# Altium PCB Xe_VDK_PCB - Copy.PcbDoc
Units mm, origin at the board's own origin, x right, y up, seen from the top; angles counter-clockwise.
Board outline 106.22 x 56.87 mm, 2 copper layers (Top Layer, Bottom Layer); 29 components, 43 nets, 191 pads, 0 vias.
Unrouted connection lines stored in the file: 2.
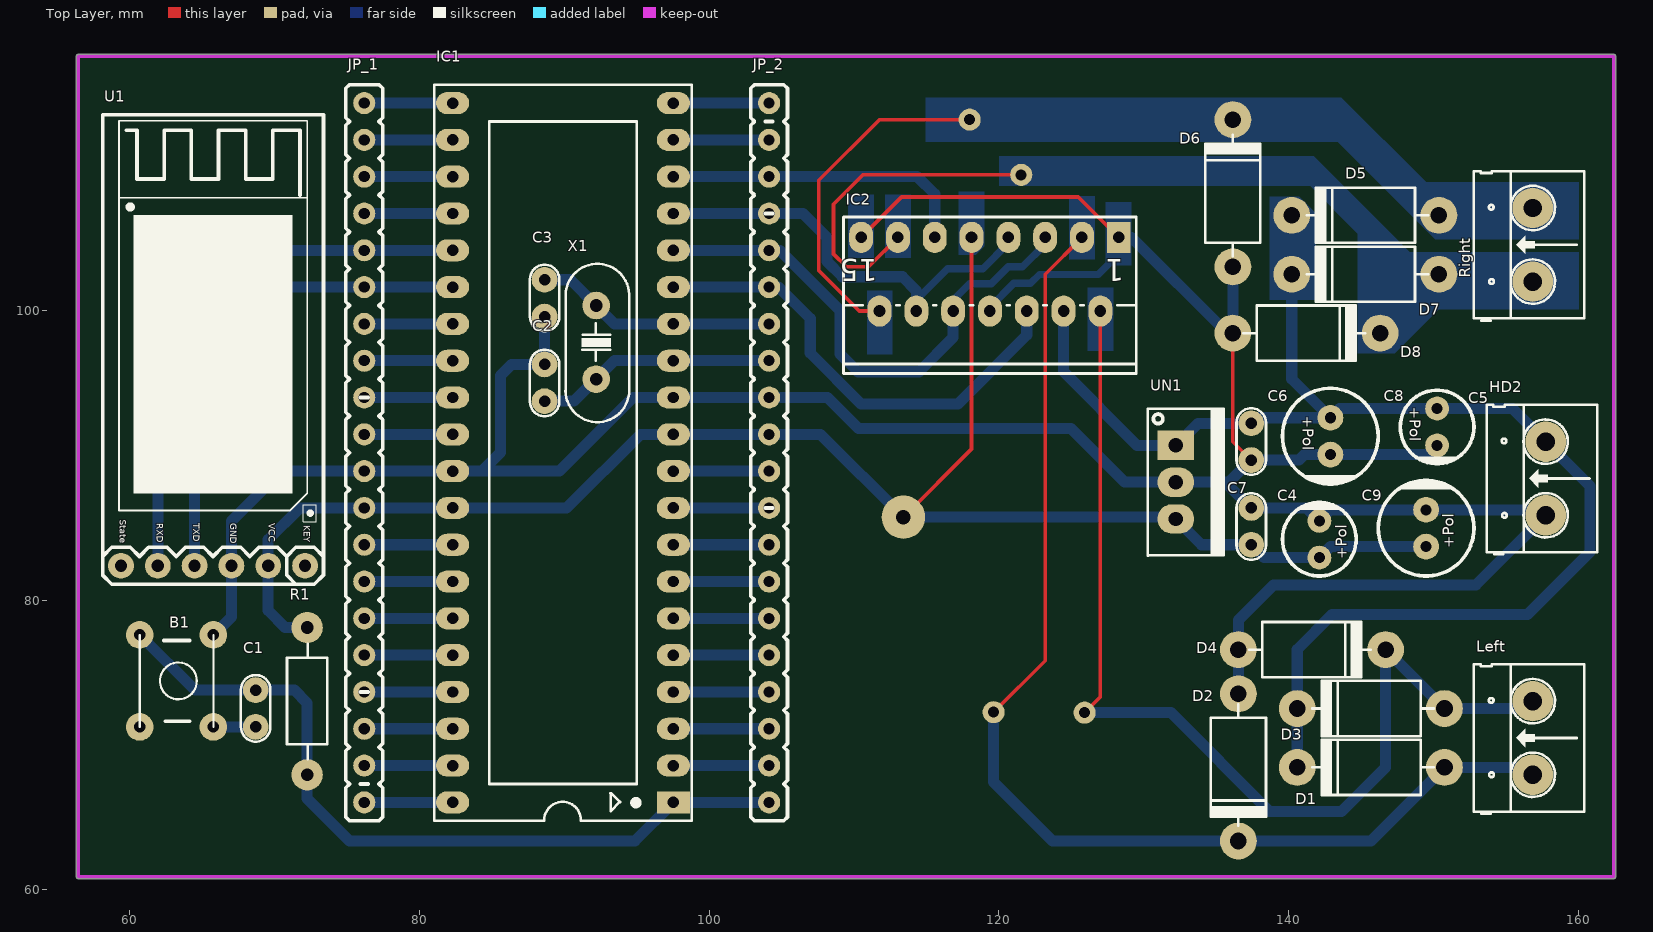
[diagram p0: Top Layer view]
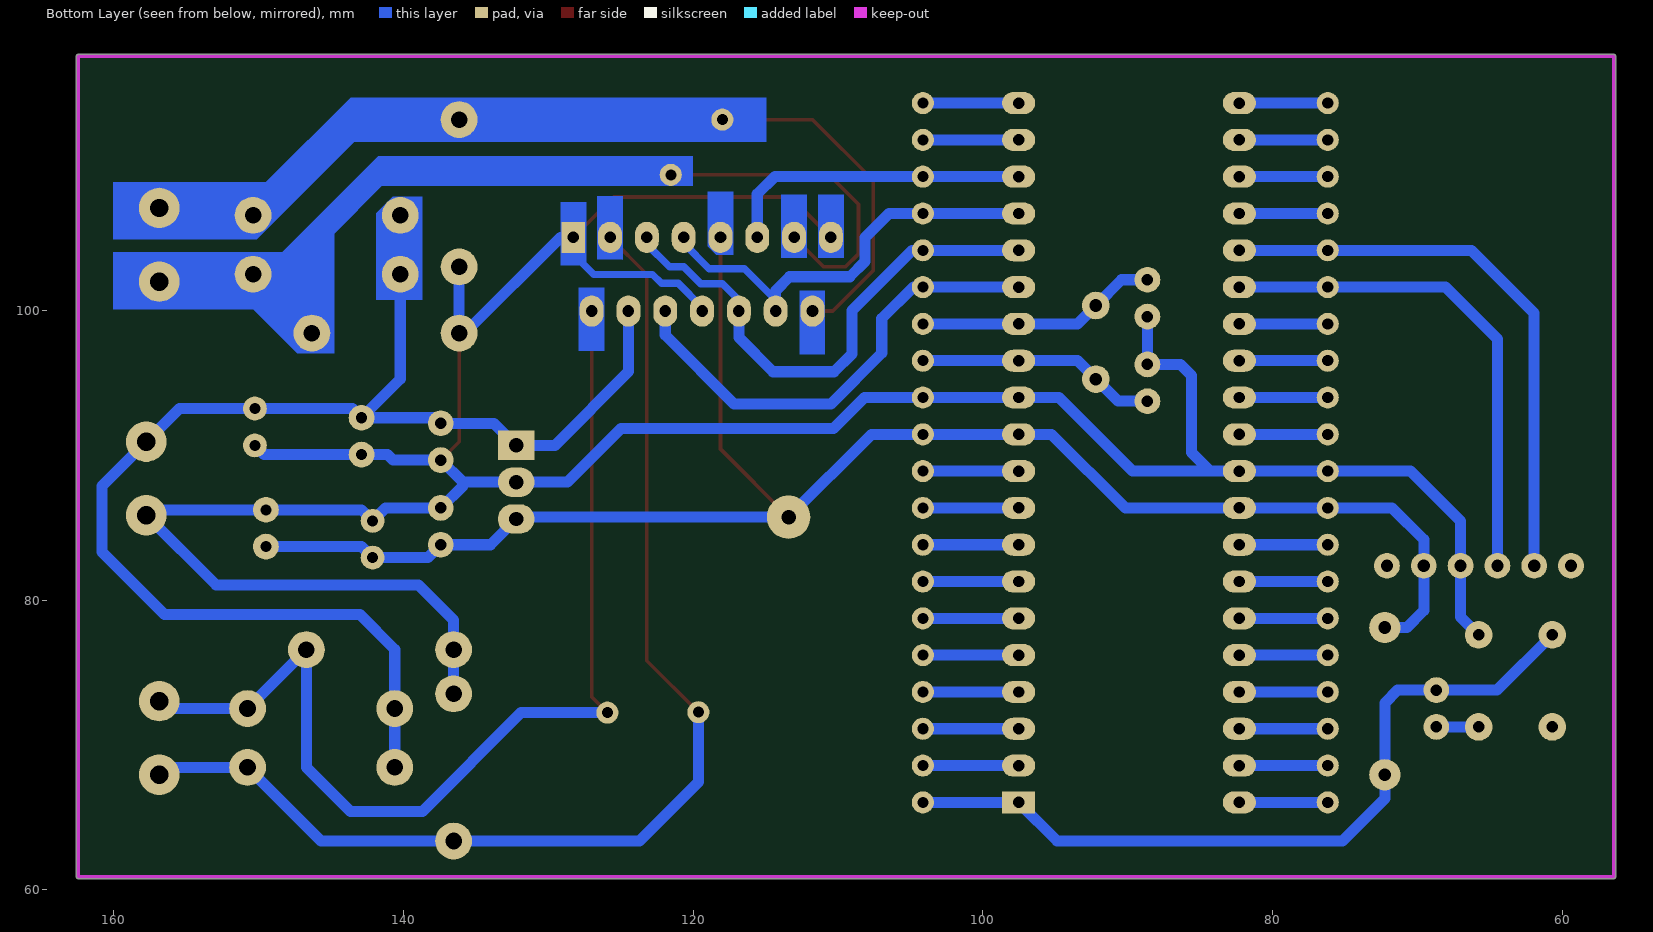
[diagram p1: Bottom Layer view, seen from below]
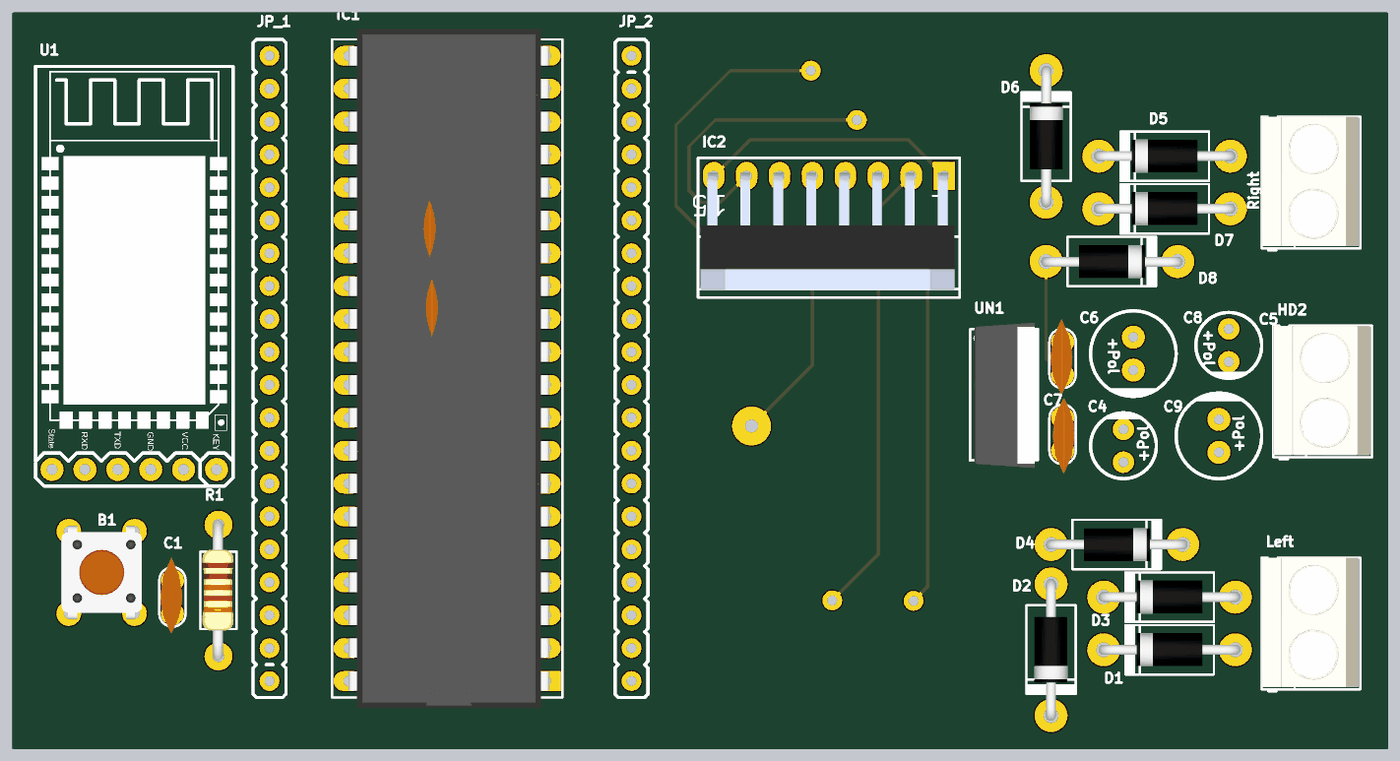
[diagram p2: 3D render of the assembled board from above, using the file's embedded part models]

## Layer stack, top to bottom
Top Solder: solder mask 0.0102, Solder Resist, Dk 3.5
Top Layer: signal copper 0.0356
Dielectric 1: dielectric 0.32, FR-4, Dk 4.8
Bottom Layer: signal copper 0.0356
Bottom Solder: solder mask 0.0102, Solder Resist, Dk 3.5

## Board outline
56.465,60.782 cw(c56.465,60.909) 56.338,60.909 56.338,117.529 cw(c56.465,117.529) 56.465,117.656 162.428,117.656 cw(c162.428,117.529) 162.555,117.529 162.555,60.909 cw(c162.428,60.909) 162.428,60.782

## Design rules (kind name [scope] priority, off if disabled: settings)
Clearance [All] p1: gap=0.127 ignorepadtopadclearanceinfootprint=FALSE
PolygonConnect [All] p1: connectstyle=Relief reliefconductorwidth=0.254 reliefentries=4 polygonreliefangle="90 Angle" airgapwidth=0.254
RoutingVias [All] p1: holewidth=0.711 width=1.27 viastyle="Through Hole" minholewidth=0.711 minwidth=1.27 maxholewidth=0.711 maxwidth=1.27
SolderMaskExpansion [All] p1: expansion=0.102
Width [All] p1: maxlimit=0.762 minlimit=0.254 preferedwidth=0.635 toplayer_maxwidth=0.254 toplayer_prefwidth=0.254 bottomlayer_minwidth=0.508 minimp=50.000000 maximp=50.000000 favimp=50.000000
30 further rules are at their usual default settings.

## Components (designator, comment, footprint, x,y, rotation, side; value= is the part's Value field where it differs from the comment)
B1 "Button" "Button - 4-pin" 63.246,74.422 r270 top
C1 "100pF" CN1 68.707,71.247 r90 top
C2 "100pF" CN1 88.646,96.266 r270 top
C3 "100pF" CN1 88.646,99.568 r90 top
C4 "Pol-Cap" Pol_200mil 142.113,84.201 r90 top
C5 "Pol-Cap" Pol_200mil 150.241,91.948 r270 top
C6 "100pF" CN1 137.414,89.662 r90 top
C7 "100pF" CN1 137.414,86.36 r270 top
C8 "Pol-Cap" POL_250mil 142.875,91.313 r270 top
C9 "Pol-Cap" POL_250mil 149.479,84.963 r90 top
D1 "Diode" Diode 145.669,68.453 r90 top
D2 "Diode" Diode 136.525,68.453 r180 top
D3 "Diode" Diode 145.669,72.517 r90 top
D4 "Diode" Diode 141.605,76.581 r270 top
D5 "Diode" Diode 145.288,106.553 r90 top
D6 "Diode" Diode 136.144,108.077 r0 top
D7 "Diode" Diode 145.288,102.489 r90 top
D8 "Diode" Diode 141.224,98.425 r270 top
HD2 "HD_2" "Header 2" 158.75,88.392 r90 top
IC1 "16F877A" DIP40/W0.6 97.536,66.04 r90 top value=PIC16F877A
IC2 "L298" DIP15SL2 119.38,102.489 r180 top
JP_1 "JP_20" JP_20 76.2,66.04 r90 top
JP_2 "JP_20" JP_20 104.14,114.3 r270 top
Left "HD_2" "Header 2" 157.861,70.485 r90 top
R1 "RESISTOR" "RES 1/2W" 72.263,67.945 r90 top value=1K
Right "HD_2" "Header 2" 157.861,104.521 r90 top
U1 "HC-05" HC-05 65.763,94.175 r0 top
UN1 "LM7805" QTO-220 132.207,90.678 r270 top
X1 "12Mhz" XT2 92.202,97.79 r270 top value=4Mhz

## Footprints (in the part's own frame and the unit in brackets; to place one, negate y for a bottom-side part, rotate by r counter-clockwise, add the part's x,y. Pads: shape width x height; smd on the part's side, far side on the other; paste and mask are expansions set on the pad)
"Button - 4-pin" [mil] "SW button 4pin, 250 x250 mil"
  round 75 hole 31: 1(-125,100) 1(125,100) 2(-125,-100) 2(125,-100)
  silkscreen extent -125,-100 125,100, body extent -156,-122 156,122, height 276
CN1 [mil]
  round 70 hole 31: 1(0,0) 2(100,0)
  silkscreen extent -40,-40 141,40, body extent -60,-30 170,37, height 265
Diode [mil]
  round 100 hole 45: A(0,-200) C(0,200)
  silkscreen extent -75,-171 75,159, body extent -50,-215 51,215, height 100
DIP15SL2 [mil]
  rect 65x85 hole 31.5: 1(-350,-100)
  oval 65x85 hole 31.5: 2(-300,100) 3(-250,-100) 4(-200,100) 5(-150,-100) 6(-100,100) 7(-50,-100) 8(0,100) 9(50,-100) 10(100,100) 11(150,-100) 12(200,100) 13(250,-100) 14(300,100) 15(350,-100)
  silkscreen extent -398,-155 398,269, body extent -382,-110 390,247, height 895
DIP40/W0.6 [mil] "40 PIN, W 600mil, Pin to pin 100mil"
  rect 60x90 hole 31: 1(0,0)
  oval 60x90 hole 31: 2(100,0) 3(200,0) 4(300,0) 5(400,0) 6(500,0) 7(600,0) 8(700,0) 9(800,0) 10(900,0) 11(1000,0) 12(1100,0) 13(1200,0) 14(1300,0) 15(1400,0) 16(1500,0) 17(1600,0) 18(1700,0) 19(1800,0) 20(1900,0) 21(1900,600) 22(1800,600) 23(1700,600) 24(1600,600) 25(1500,600) 26(1400,600) 27(1300,600) 28(1200,600) 29(1100,600) 30(1000,600) 31(900,600) 32(800,600) 33(700,600) 34(600,600) 35(500,600) 36(400,600) 37(300,600) 38(200,600) 39(100,600) 40(0,600)
  silkscreen extent -50,-50 1950,650, body extent -82,-10 1982,600, height 224
HC-05 [mm]
  rect 1.3x1 on Top Overlay: 1(-6.5,11.805) 2(-6.5,10.305) 3(-6.5,8.805) 4(-6.5,7.305) 5(-6.5,5.805) 6(-6.5,4.305) 7(-6.5,2.805) 8(-6.5,1.305) 9(-6.5,-0.195) 10(-6.5,-1.695) 11(-6.5,-3.195) 12(-6.5,-4.695) 13(-6.5,-6.195) 22(6.5,-6.195) 23(6.5,-4.695) 24(6.5,-3.195) 25(6.5,-1.695) 26(6.5,-0.195) 27(6.5,1.305) 28(6.5,2.805) 29(6.5,4.305) 30(6.5,5.805) 31(6.5,7.305) 32(6.5,8.805) 33(6.5,10.305) 34(6.5,11.805)
  round 1.778 hole 0.838: 1(6.35,-11.805) 2(3.81,-11.805) 3(1.27,-11.805) 4(-1.27,-11.805) 5(-3.81,-11.805) 6(-6.35,-11.805)
  rect 1x1.3 on Top Overlay: 14(-5.25,-7.995) 15(-3.75,-7.995) 16(-2.25,-7.995) 17(-0.75,-7.995) 18(0.75,-7.995) 19(2.25,-7.995) 20(3.75,-7.995) 21(5.25,-7.995)
  silkscreen extent -7.62,-13.08 7.62,19.31
"Header 2" [mil]
  round 110 hole 50: 1(-100,40) 2(100,40)
  silkscreen extent -206,-100 200,200, body extent -194,-95 200,200, height 394
JP_20 [mil]
  round 60 hole 30: 1(0,0) 2(100,0) 3(200,0) 4(300,0) 5(400,0) 6(500,0) 7(600,0) 8(700,0) 9(800,0) 10(900,0) 11(1000,0) 12(1100,0) 13(1200,0) 14(1300,0) 15(1400,0) 16(1500,0) 17(1600,0) 18(1700,0) 19(1800,0) 20(1900,0)
  silkscreen extent -50,-50 1950,50
Pol_200mil [mil] "electrolytic capacitor, T? phân c?c 200x440mil, kho?ng cách pins 100mil"
  round 65 hole 30: +(-50,0) -(50,0)
  silkscreen extent -100,-100 100,100
POL_250mil [mil]
  round 70 hole 30: +(-50,0) -(50,0)
  silkscreen extent -130,-130 130,130
QTO-220 [mil] "TO-220 - 1-2-3"
  rect 80x100 hole 39: 1(0,0)
  oval 80x100 hole 39: 2(100,0) 3(200,0)
  silkscreen extent -100,-76 300,130, body extent -119,-64 322,121, height 755
"RES 1/2W" [mil] "R 1/2W, 2 pin, 300mil"
  round 85 hole 35: 1(0,0) 2(400,0)
  silkscreen extent 42,-55 356,55, body extent -12,-45 414,49, height 91
XT2 [mil] "Footpin for Crystal 2 pin"
  round 75 hole 34: 1(-100,0) 2(100,0)
  silkscreen extent -213,-83 217,90, body extent -216,-87 216,90, height 144

## Part data
C1 C2 C3 C6 C7: library part CN1, "Cap np  1pF - 472pF"
C4 C5 C8 C9: "T? di?n phân c?c"
IC1: library part 16F877, "8K FLASH, 368B RAM, 256B EFROM", Copyright by=VanDungEvn
IC2: "Dual Full-H Driver", ComponentLink1Description="Manufacturer Link", ComponentLink1URL=http://www.ti.com/, DatasheetVersion=Jun-1990, Note="The tab is elec is connected to GND pin", PackageDescription="TO, Thru-Hole, Vertical, Heatsink Mounted; 15 Bent Staggered Leads; Pitch 1.27 mm", PackageReference=KV015, Published=15-May-2002, Publisher="Altium Limited"
R1: "Resistor"
UN1: "Positive Voltage Regulator"
X1: library part XT2, "Crystal, 32.768 KHz, -40 to 85 degC, 3.2 x 1.5 x 0.9 mm SMD"

## Free pads (board coordinates)
  round 3 hole 1: 2(113.411,85.725)
  round 1.524 hole 0.762: 3(117.983,113.157) 4(121.539,109.347) 5(125.913,72.229) 6(119.634,72.263)

## Nets (pads, with @x,y where several pads share a name; then routed paths per layer and width w, separated by ;. In a path a pad name is that pad's centre, name@x,y a point inside that pad or via, vN(x,y) a via of type N, cw(c..) or ccw(c..) an arc to the next point about the centre after c; other vN are vias at no path point)
+5: C4.+ C7.2 C9.+ IC1.11 IC1.32 IC2.9 JP_1.9 JP_2.10 pad.2 R1.2 U1.2@69.573,82.37 UN1.3 | length 116.1
  Top Layer w0.254: pad.2 118.11,90.424 IC2.9
  Bottom Layer w0.762: R1.2 70.739,78.105 69.573,79.271 69.573,82.37 69.573,84.178 71.755,86.36 JP_1.9 IC1.32 90.17,86.36 95.25,91.44 IC1.11 JP_2.10 107.696,91.44 pad.2 132.08,85.725 UN1.3 133.985,83.82 C7.2 138.303,82.931 C4.+ 142.875,83.693 C9.+
+12: C5.+ C6.2 C8.+ D1.C D3.C D5.C D7.C HD2.2 IC2.4 UN1.1 | length 96.6
  Bottom Layer w0.762: IC2.4 124.46,95.761 129.543,90.678 UN1.1 133.731,92.202 C6.2 137.795,92.583 C8.+ ; D5.C D7.C 140.208,95.25 C8.+ ; D1.C D3.C 140.589,76.581 143.002,78.994 156.464,78.994 160.782,83.312 160.782,87.884 HD2.2 155.448,93.218 C5.+ 143.51,93.218 C8.+
GND: B1.1 C1.1 C2.1 C3.1 C4.- C5.- C6.1 C7.1 C8.- C9.- D2.A D4.A D6.A D8.A HD2.1 IC1.12 IC1.31 IC2.1 IC2.8 IC2.15 JP_1.10 JP_2.9 U1.3@67.033,82.37 UN1.2 | length 224.5
  Top Layer w0.254: IC2.15 113.284,107.823 125.476,107.823 IC2.1 ; D8.A 136.144,90.932 C6.1
  Bottom Layer w0.508: IC2.8 119.38,100.203 121.031,101.854 122.183,101.854 122.8,102.471 126.855,102.471 128.27,103.886 IC2.1
  Bottom Layer w0.762: B1.1@65.786,71.247 C1.1 ; B1.1@65.786,77.597 67.033,78.844 67.033,82.37 67.033,85.448 70.485,88.9 JP_1.10 IC1.31 84.328,88.9 ; C3.1 C2.1 86.36,96.266 85.598,95.504 85.598,90.17 84.328,88.9 ; IC2.1 129.159,105.029 135.636,98.552 136.017,98.552 D8.A D6.A ; D2.A D4.A 136.525,78.613 138.938,81.026 152.908,81.026 HD2.1 157.353,86.233 C9.- 142.875,86.233 C4.- 141.224,86.36 C7.1 135.89,87.884 135.89,88.138 ; C5.- 149.606,90.043 C8.- 141.097,90.043 140.716,89.662 C6.1 135.89,88.138 ; 84.328,88.9 89.662,88.9 94.742,93.98 IC1.12 JP_2.9 108.172,93.98 110.324,91.828 124.961,91.828 128.651,88.138 UN1.2 135.89,88.138
"HC05 > PIC": IC1.26 JP_1.15 U1.4@64.493,82.37 | length 34.9
  Bottom Layer w0.762: U1.4@64.493,82.37 64.493,98.021 68.072,101.6 JP_1.15 IC1.26
NetB1_2: B1.2 C1.2 IC1.1 JP_2.20 R1.1 | length 54.3
  Bottom Layer w0.762: B1.2@60.706,77.597 64.516,73.787 C1.2 71.374,73.787 72.263,72.898 R1.1 72.263,66.294 75.184,63.373 94.869,63.373 IC1.1 JP_2.20
NetC2_2: C2.2 IC1.13 JP_2.8 X1.2 | length 16.7
  Bottom Layer w0.762: C2.2 90.678,93.726 X1.2 93.472,96.52 IC1.13 JP_2.8
NetC3_2: C3.2 IC1.14 JP_2.7 X1.1 | length 16.8
  Bottom Layer w0.762: C3.2 90.424,102.108 X1.1 93.472,99.06 IC1.14 JP_2.7
NetIC1_2: IC1.2 JP_2.19 | length 6.6
  Bottom Layer w0.762: IC1.2 JP_2.19
NetIC1_3: IC1.3 JP_2.18 | length 6.6
  Bottom Layer w0.762: IC1.3 JP_2.18
NetIC1_4: IC1.4 JP_2.17 | length 6.6
  Bottom Layer w0.762: IC1.4 JP_2.17
NetIC1_5: IC1.5 JP_2.16 | length 6.6
  Bottom Layer w0.762: IC1.5 JP_2.16
NetIC1_6: IC1.6 JP_2.15 | length 6.6
  Bottom Layer w0.762: IC1.6 JP_2.15
NetIC1_7: IC1.7 JP_2.14 | length 6.6
  Bottom Layer w0.762: IC1.7 JP_2.14
NetIC1_8: IC1.8 JP_2.13 | length 6.6
  Bottom Layer w0.762: IC1.8 JP_2.13
NetIC1_9: IC1.9 JP_2.12 | length 6.6
  Bottom Layer w0.762: IC1.9 JP_2.12
NetIC1_10: IC1.10 JP_2.11 | length 6.6
  Bottom Layer w0.762: IC1.10 JP_2.11
NetIC1_19: IC1.19 JP_2.2 | length 6.6
  Bottom Layer w0.762: IC1.19 JP_2.2
NetIC1_20: IC1.20 JP_2.1 | length 6.6
  Bottom Layer w0.762: IC1.20 JP_2.1
NetIC1_21: IC1.21 JP_1.20 | length 6.1
  Bottom Layer w0.762: JP_1.20 IC1.21
NetIC1_22: IC1.22 JP_1.19 | length 6.1
  Bottom Layer w0.762: JP_1.19 IC1.22
NetIC1_23: IC1.23 JP_1.18 | length 6.1
  Bottom Layer w0.762: JP_1.18 IC1.23
NetIC1_24: IC1.24 JP_1.17 | length 6.1
  Bottom Layer w0.762: JP_1.17 IC1.24
NetIC1_27: IC1.27 JP_1.14 | length 6.1
  Bottom Layer w0.762: JP_1.14 IC1.27
NetIC1_28: IC1.28 JP_1.13 | length 6.1
  Bottom Layer w0.762: JP_1.13 IC1.28
NetIC1_29: IC1.29 JP_1.12 | length 6.1
  Bottom Layer w0.762: JP_1.12 IC1.29
NetIC1_30: IC1.30 JP_1.11 | length 6.1
  Bottom Layer w0.762: JP_1.11 IC1.30
NetIC1_33: IC1.33 JP_1.8 | length 6.1
  Bottom Layer w0.762: JP_1.8 IC1.33
NetIC1_34: IC1.34 JP_1.7 | length 6.1
  Bottom Layer w0.762: JP_1.7 IC1.34
NetIC1_35: IC1.35 JP_1.6 | length 6.1
  Bottom Layer w0.762: JP_1.6 IC1.35
NetIC1_36: IC1.36 JP_1.5 | length 6.1
  Bottom Layer w0.762: JP_1.5 IC1.36
NetIC1_37: IC1.37 JP_1.4 | length 6.1
  Bottom Layer w0.762: JP_1.4 IC1.37
NetIC1_38: IC1.38 JP_1.3 | length 6.1
  Bottom Layer w0.762: JP_1.3 IC1.38
NetIC1_39: IC1.39 JP_1.2 | length 6.1
  Bottom Layer w0.762: JP_1.2 IC1.39
NetIC1_40: IC1.40 JP_1.1 | length 6.1
  Bottom Layer w0.762: JP_1.1 IC1.40
P+: D7.A D8.C IC2.13 pad.4 Right.1 | length 68.6
  Top Layer w0.254: IC2.13 110.998,102.997 109.474,102.997 108.585,103.886 108.585,107.315 110.617,109.347 pad.4
  Bottom Layer w0.762: pad.4 142.24,109.347 146.304,105.283 D8.C D7.A 156.337,102.489 Right.1
P-: D5.A D6.C IC2.14 pad.3 Right.2 | length 65.5
  Top Layer w0.254: IC2.14 110.363,99.949 107.569,102.743 107.569,108.966 111.76,113.157 pad.3
  Bottom Layer w0.762: pad.3 D6.C 143.764,113.157 D5.A 156.337,106.553 Right.2
"PIC > HC05": IC1.25 JP_1.16 U1.5@61.953,82.37 | length 39.6
  Bottom Layer w0.762: U1.5@61.953,82.37 61.953,99.799 66.294,104.14 JP_1.16 IC1.25
RC0: IC1.15 IC2.6 JP_2.6 | length 32.7
  Bottom Layer w0.762: IC1.15 JP_2.6 104.797,101.6 106.978,99.419 106.978,97.037 110.471,93.544 117.166,93.544 121.92,98.298 IC2.6
RC1: IC1.16 IC2.5 IC2.10 JP_2.5 | length 36.5
  Bottom Layer w0.508: IC2.10 116.84,100.711 117.965,101.836 119.478,101.836 120.639,102.997 121.628,102.997 123.19,104.559 IC2.5
  Bottom Layer w0.762: IC1.16 JP_2.5 104.894,104.14 109.037,99.996 109.037,96.982 110.262,95.757 114.479,95.757 116.84,98.118 IC2.10
RC2: IC1.17 IC2.7 IC2.12 JP_2.4 | length 29.7
  Bottom Layer w0.508: IC2.12@114.3,100.711 116.451,102.862 118.897,102.862 120.65,104.615 IC2.7
  Bottom Layer w0.762: IC1.17 JP_2.4 106.491,106.68 108.144,105.027 108.144,103.358 109.187,102.315 113.331,102.315 114.3,101.346 114.3,100.711 IC2.12
RC3: IC1.18 IC2.11 JP_2.3 | length 21.5
  Bottom Layer w0.762: IC1.18 JP_2.3 114.36,109.22 115.57,108.01 IC2.11
T+: D3.A D4.C IC2.2 Left.2 pad.5 | length 73.2
  Top Layer w0.254: pad.5 127,73.316 IC2.2
  Bottom Layer w0.762: pad.5 131.86,72.229 138.684,65.405 143.637,65.405 146.685,68.453 D4.C D3.A 156.337,72.517 Left.2
T-: D1.A D2.C IC2.3 Left.1 pad.6 | length 81.3
  Top Layer w0.254: pad.6 123.19,75.819 123.19,102.489 IC2.3
  Bottom Layer w0.762: pad.6 119.634,67.437 123.698,63.373 D2.C 145.669,63.373 D1.A 156.337,68.453 Left.1
pads on no net: U1.1 U1.2@59.263,104.48 U1.3@59.263,102.98 U1.4@59.263,101.48 U1.5@59.263,99.98 U1.6 U1.7 U1.8 U1.9 U1.10 U1.11 U1.12 U1.13 U1.14 U1.15 U1.16 U1.17 U1.18 U1.19 U1.20 U1.21 U1.22 U1.23 U1.24 U1.25 U1.26 U1.27 U1.28 U1.29 U1.30 U1.31 U1.32 U1.33 U1.34

## Keep-outs
Keep-Out Layer:
  lines w0.254: 56.465,60.909 56.465,117.529 59.733,117.529 162.428,117.529 162.428,60.909 56.465,60.909

## Other copper
Top Layer:
  region: 110.998,92.456
Bottom Layer:
  region net T-: 124.853,103.505 126.602,103.505 126.602,107.86 124.852,107.86 124.852,103.505
  region net +5: 117.24,103.819 118.403,103.819 118.989,104.406 118.989,108.175 117.24,108.175
  region net GND: 127.373,103.115 129.122,103.115 129.122,107.47 127.372,107.47 127.372,103.115
  region net T+: 126.135,97.2 127.884,97.2 127.884,101.555 126.134,101.555 126.134,97.2
  region net P+: 112.161,103.627 113.91,103.627 113.91,107.982 112.16,107.982 112.16,103.626
  region net P-: 110.898,96.981 112.647,96.981 112.647,101.335 110.897,101.335 110.897,96.98
  region net GND: 109.619,103.617 111.367,103.617 111.367,107.971 109.618,107.971 109.618,103.616
  region: 109.474,103.886
  region net +12: 140.716,107.823 141.859,106.68 141.859,100.711 138.684,100.711 138.684,107.823
  region net P+: 120.015,108.585 141.478,108.585 144.78,105.283 144.78,97.028 147.32,97.028 150.368,100.076 160.02,100.076 160.02,104.013 148.336,104.013 141.732,110.617 120.015,110.617
  region net P-: 143.383,111.633 150.114,104.902 160.02,104.902 160.02,108.839 149.479,108.839 143.637,114.681 114.962,114.681 114.962,111.633

## Silkscreen, mask and mechanical layers (free items; w line width, h text height)
Top Overlay:
  region: 119.507,104.267

## Text inside footprints (layer, text, board x,y; h text height)
C4: Top Overlay "+Pol" at 144.018,82.804 h0.76 r90
C5: Top Overlay "+Pol" at 148.336,93.345 h0.76 r270
C8: Top Overlay "+Pol" at 140.97,92.71 h0.76 r270
C9: Top Overlay "+Pol" at 151.384,83.566 h0.76 r90
IC2: Top Overlay "15" at 111.633,103.505 h1.5 r180; Top Overlay "1" at 128.651,103.505 h1.5 r180
U1: Top Overlay "State" at 59.159,85.545 h0.76 r270; Top Overlay "RXD" at 61.699,85.291 h0.76 r270; Top Overlay "TXD" at 64.239,85.291 h0.76 r270; Top Overlay "GND" at 66.779,85.291 h0.76 r270; Top Overlay "VCC" at 69.446,85.291 h0.76 r270; Top Overlay "KEY" at 71.859,85.164 h0.76 r270